# EAGLE board Thing_Plus_MGM240P-Panel (EAGLE 9.6.2), part 1 of 2
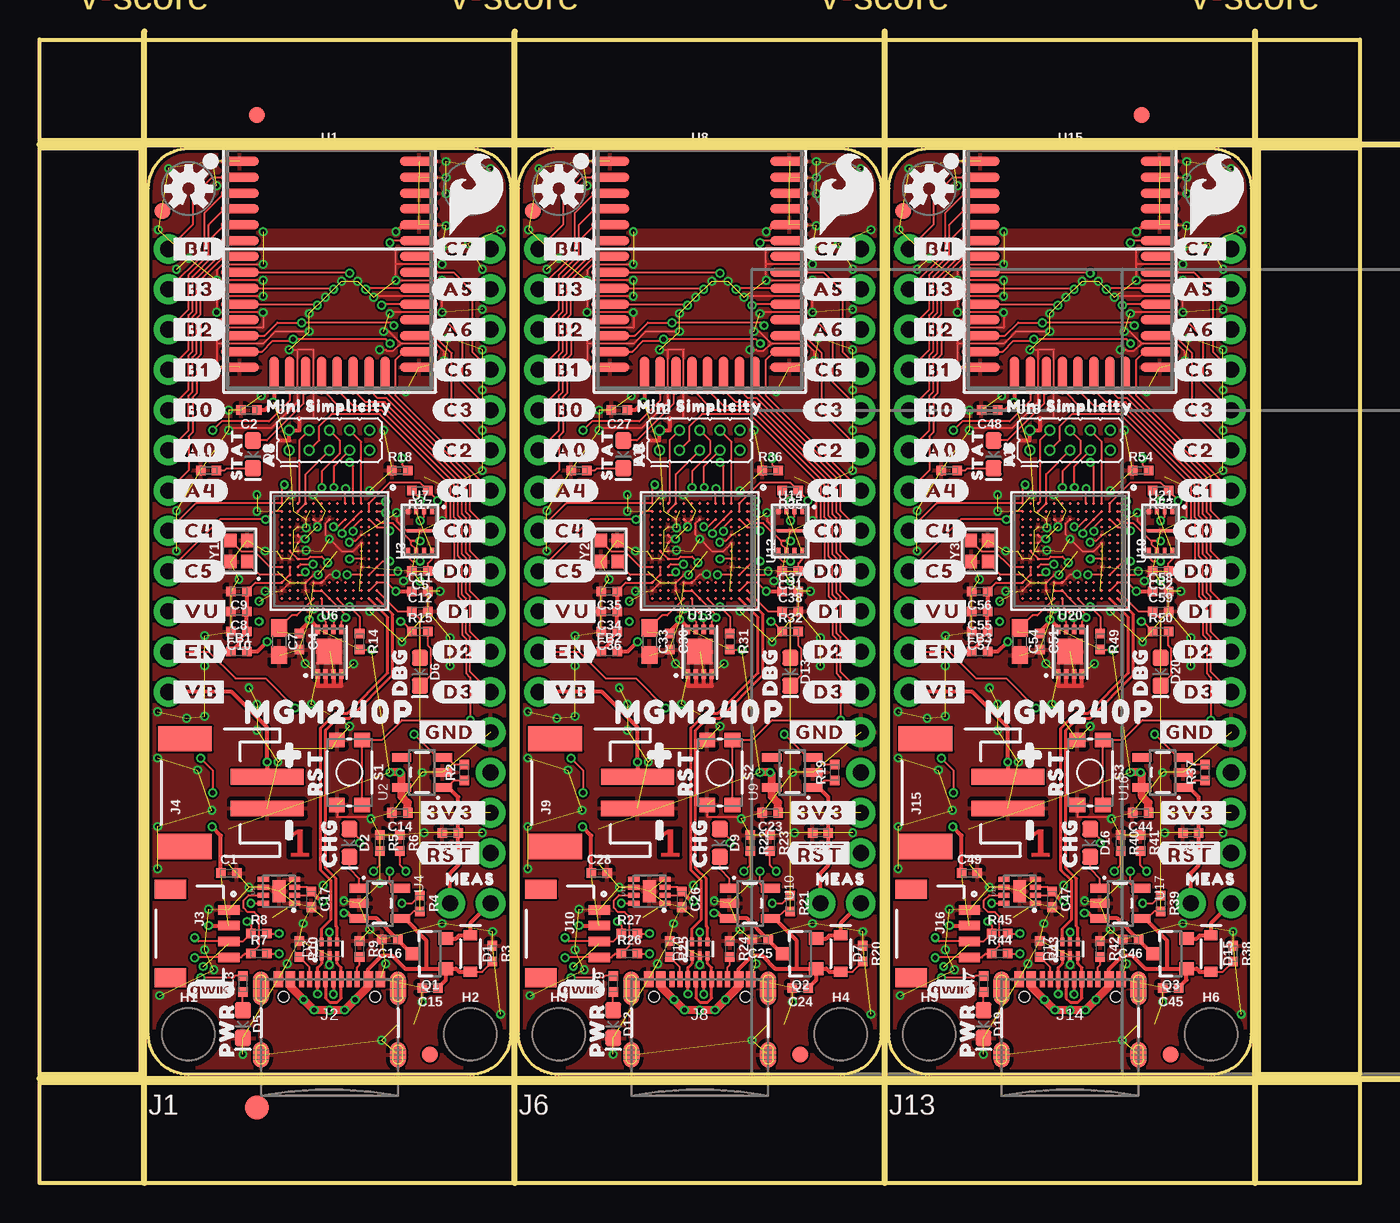
[diagram p0: board, top side]
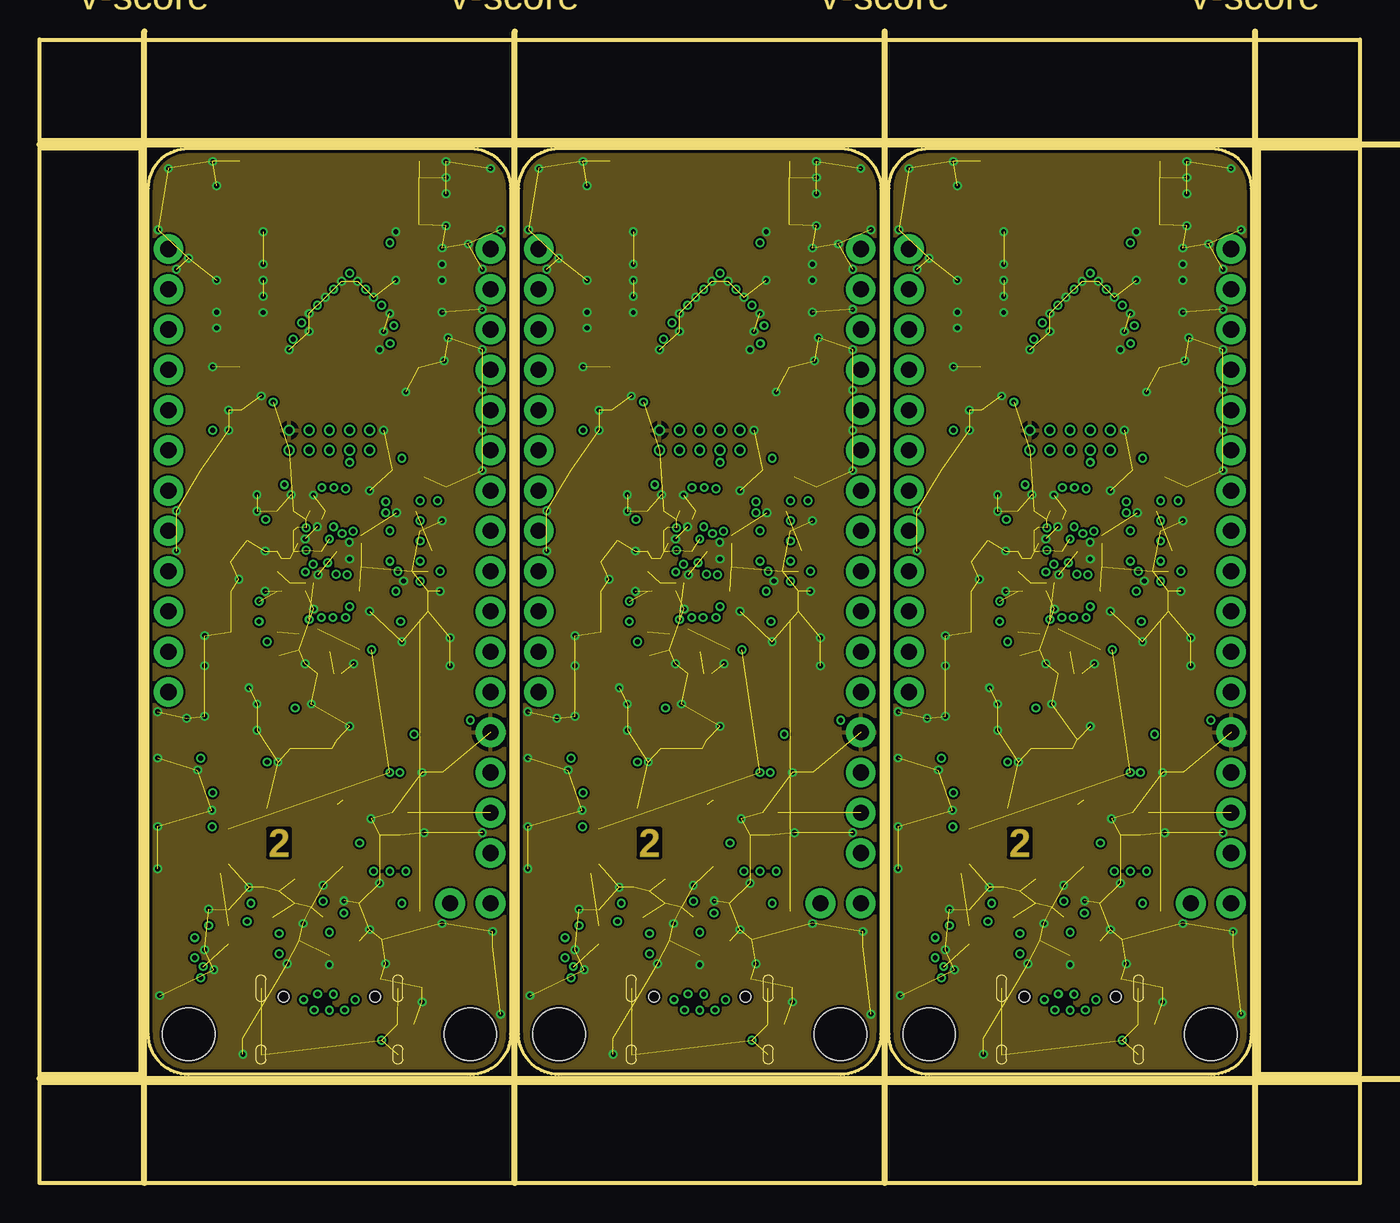
[diagram p1: board, inner layer Route2]
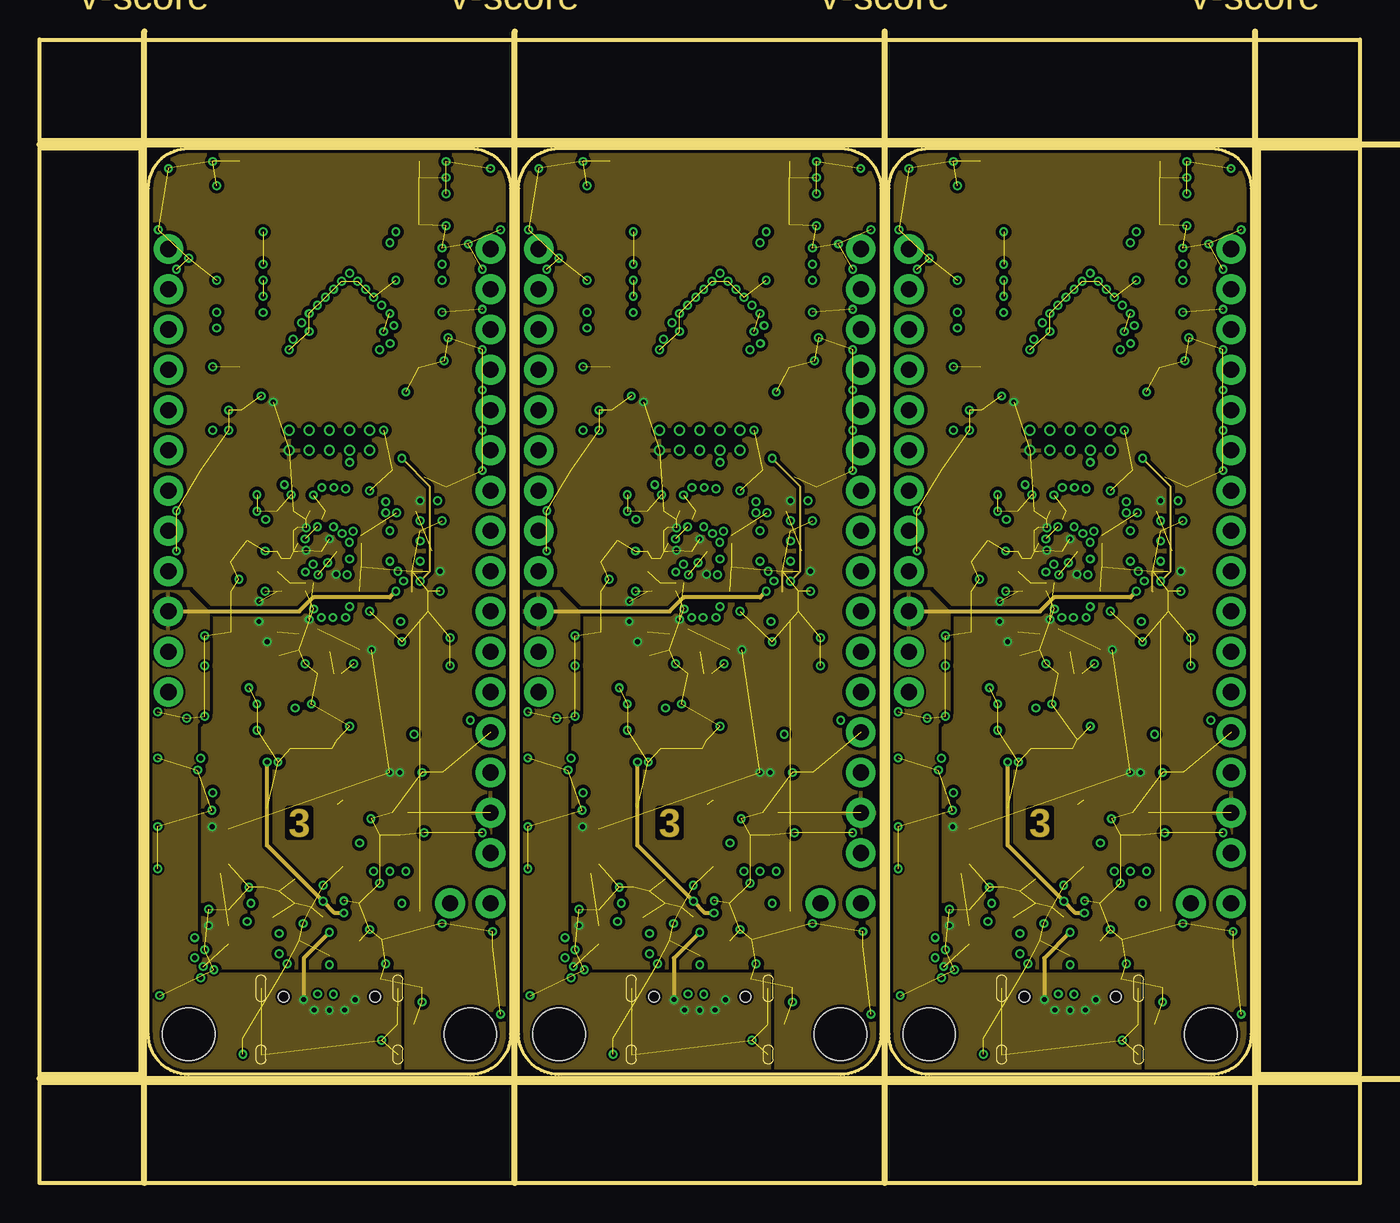
[diagram p2: board, inner layer Route15]
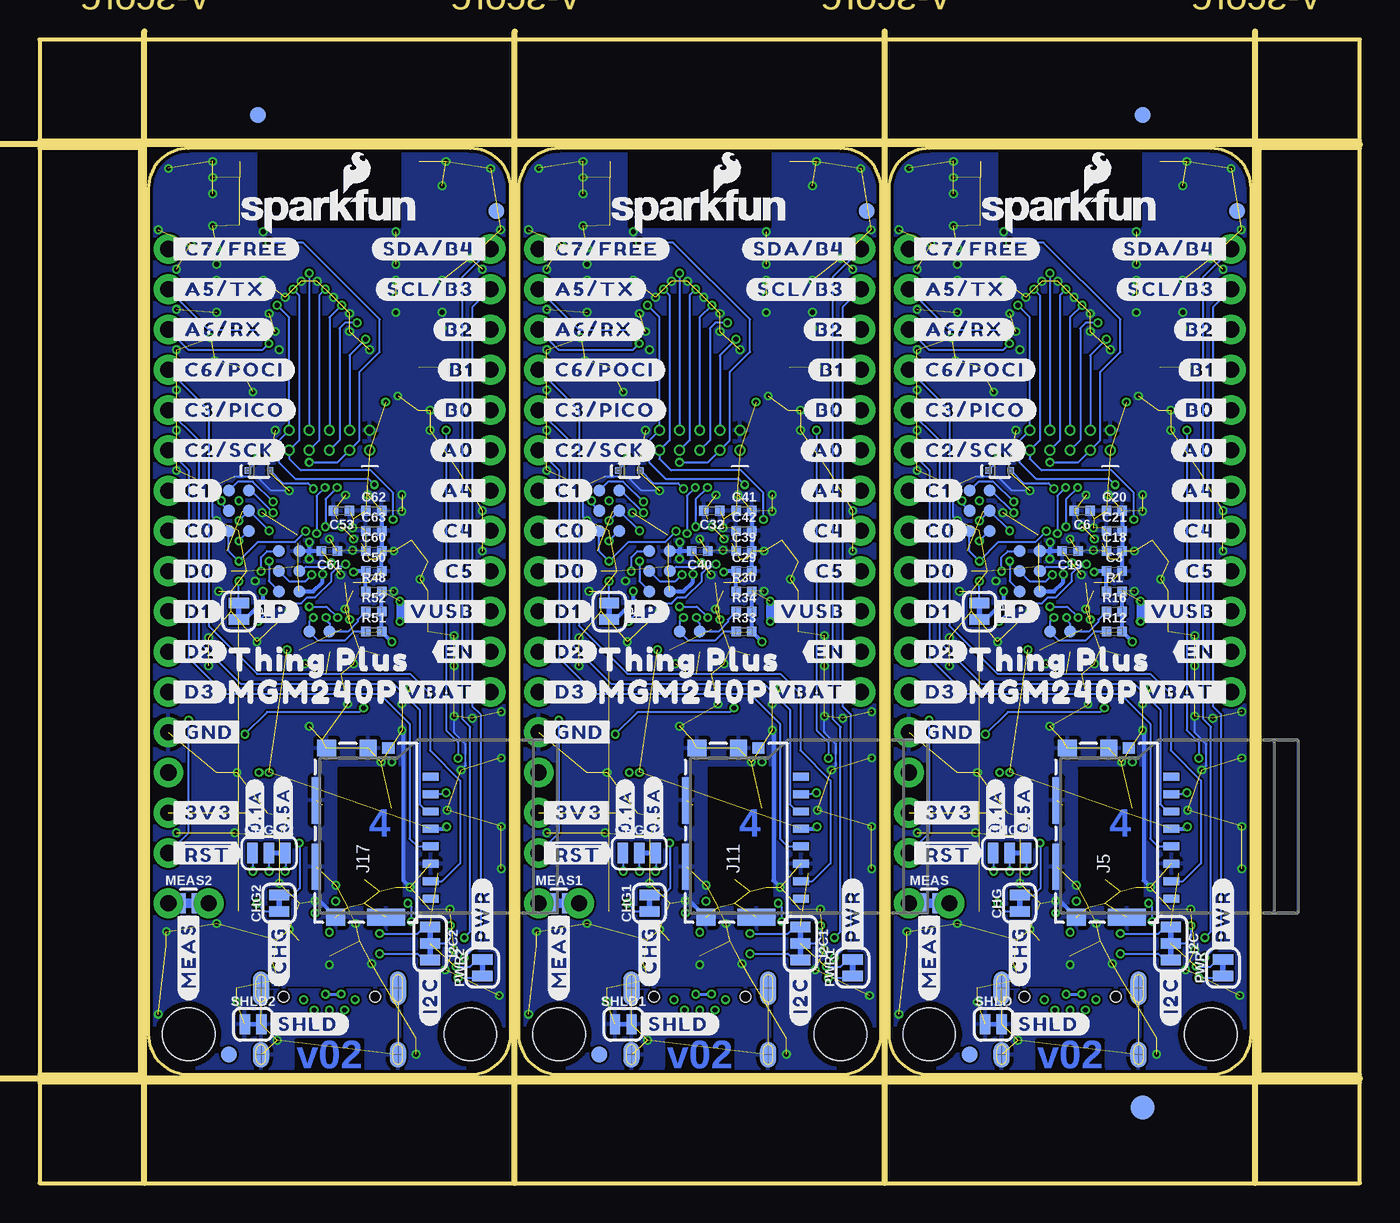
[diagram p3: board, bottom side, seen from below]

Size 83.31 x 72.14 mm. Coordinates in mm from the lower left corner, seen from the top.
Outline: 6.86,62.74 arc-90 9.4,65.28 27.18,65.28 arc-90 29.72,62.74 29.72,9.4 arc-90 27.18,6.86 9.4,6.86 arc-90 6.86,9.4 6.86,62.74
Outline: 30.23,62.74 arc-90 32.77,65.28 50.55,65.28 arc-90 53.09,62.74 53.09,9.4 arc-90 50.55,6.86 32.77,6.86 arc-90 30.23,9.4 30.23,62.74
Outline: 53.59,62.74 arc-90 56.13,65.28 73.91,65.28 arc-90 76.45,62.74 76.45,9.4 arc-90 73.91,6.86 56.13,6.86 arc-90 53.59,9.4 53.59,62.74
Outline: 0,6.35 83.31,6.35 83.31,0 0,0 0,6.35
Outline: 76.96,65.28 83.31,65.28 83.31,6.86 76.96,6.86 76.96,65.28
Outline: 0,72.14 83.31,72.14 83.31,65.79 0,65.79 0,72.14
Outline: 0,65.28 6.35,65.28 6.35,6.86 0,6.86 0,65.28
Copper layers (1*2*15*16): Top 0.035559375mm / dielectric 0.47751875mm / Route2 0.035559375mm / dielectric 0.47751875mm / Route15 0.035559375mm / dielectric 0.47751875mm / Bottom 0.035559375mm
Design rules "Thing_Plus_MGM240P": minimum track width 5mil, minimum drill 0.2mm, track to track 5mil, track to pad 5mil, pad to pad 5mil, via to via 5mil, smd to smd 5mil, copper to edge 7mil, drill to drill 7mil, minimum pad ring 5mil, minimum via ring 5mil, stop-mask expansion 2.5mil, vias tented up to drill 25mil, thermal gap 10mil
Net classes: 1 USB: width 0.185 mm, clearance 0.127 mm
tRestrict: area 23.7,63.9 to 24.1,64; area 23.7,62.9 to 24.1,63; area 47.1,63.9 to 47.5,64; area 47.1,62.9 to 47.5,63; area 70.5,63.9 to 70.9,64; area 70.5,62.9 to 70.9,63
bRestrict: area 16.6,51.1 to 16.8,51.2; area 17.3,52.1 to 17.4,52.2; area 17.9,53.7 to 18,53.8; area 18.5,54.5 to 18.7,54.6; area 19.2,55.9 to 19.3,56; area 19.8,55.9 to 19.9,56; area 20.4,54.5 to 20.6,54.6; area 40,51.1 to 40.1,51.2; area 40.6,52.1 to 40.8,52.2; area 41.3,53.7 to 41.4,53.8; area 41.9,54.5 to 42,54.6; area 42.5,55.9 to 42.7,56; area 43.2,55.9 to 43.3,56; area 43.8,54.5 to 43.9,54.6; area 63.4,51.1 to 63.5,51.2; area 64,52.1 to 64.1,52.2; area 64.6,53.7 to 64.8,53.8; area 65.3,54.5 to 65.4,54.6; area 65.9,55.9 to 66,56; area 66.5,55.9 to 66.7,56; area 67.2,54.5 to 67.3,54.6
Milling: 6 lines

## Footprints (pad centres in the part's own frame; a part is rotated, then mirrored left to right if it is on the bottom)
0402-TIGHT = smd 0.6 x 0.6: 1 -0.5,0; 2 0.5,0
0603 = smd 1.1 x 1: 1 -0.85,0; 2 0.85,0
SMT-JUMPER_2_NC_TRACE_SILK = smd 0.66 x 1.27: 1 -0.521,0; 2 0.521,0
SMT-JUMPER_3_1-NC_TRACE_SILK = smd 0.66 x 1.27: 1 -1.041,0; 2 0,0; 3 1.041,0
SOD-323 = smd 0.63 x 0.83: A 1.15,0; C -1.15,0
LED-0603 = smd 1 x 1: A -0.877,0; C 0.877,0
SOT886 = smd 0.61 x 0.25: 1 -0.405,0.5 | smd 0.56 x 0.25: 2 -0.43,0; 3 -0.43,-0.5; 4 0.43,-0.5; 5 0.43,0; 6 0.43,0.5
SOD-523 = smd 0.4 x 0.4: A -0.7,0; C 0.7,0
FIDUCIAL-1X2 = smd 1 x 1: 1 0,0
FIDUCIAL-1.5X3 = smd 1.5 x 1.5: 1 0,0
STAND-OFF = hole 3.302: 0,0
SMT-JUMPER_3_2-NC_TRACE_SILK = smd 0.66 x 1.27: 1 -1.041,0; 2 0,0; 3 1.041,0
THING_PLUS = drill 1.016 pad 1.88: 1 1.27,52.07; 2 1.27,49.53; 3 1.27,46.99; 4 1.27,44.45; 5 1.27,41.91; 6 1.27,39.37; 7 1.27,36.83; 8 1.27,34.29; 9 1.27,31.75; 10 1.27,29.21; 11 1.27,26.67; 12 1.27,24.13; 13 21.59,52.07; 14 21.59,49.53; 15 21.59,46.99; 16 21.59,44.45; 17 21.59,41.91; 18 21.59,39.37; 19 21.59,36.83; 20 21.59,34.29; 21 21.59,31.75; 22 21.59,29.21; 23 21.59,26.67; 24 21.59,24.13; 25 21.59,21.59; 26 21.59,19.05; 27 21.59,16.51; 28 21.59,13.97
USB-C-16P-4LAYER-ISOLATED = smd 0.3 x 1: A5 -1.25,-0.34; A6 -0.25,-0.34; A7 0.25,-0.34; A8 1.25,-0.34; B5 1.75,-0.34; B6 0.75,-0.34; B7 -0.75,-0.34; B8 -1.75,-0.34 | smd 0.6 x 1: GND -3.225,-0.34; GND2 3.225,-0.34; VBUS1 -2.45,-0.34; VBUS2 2.45,-0.34 | smd 1 x 2.1: SHLD1 -4.32,-0.915; SHLD2 4.32,-0.915 | smd 1 x 2.1 bottom: SHLD3 -4.32,-0.915; SHLD4 4.32,-0.915 | smd 1 x 1.6: SHLD5 -4.32,-5.095; SHLD8 4.32,-5.095 | smd 1 x 1.6 bottom: SHLD6 -4.32,-5.095; SHLD7 4.32,-5.095 | hole 0.65: -2.89,-1.445; 2.89,-1.445
JST04_1MM_RA = smd 0.6 x 1.35: 1 -1.5,0; 2 -0.5,0; 3 0.5,0; 4 1.5,0 | smd 1.2 x 2: NC1 2.8,-3.675; NC2 -2.8,-3.675
JST-2-SMD = smd 1 x 4.6: 1 -1,-3.7; 2 1,-3.7 | smd 1.6 x 3.4: NC1 -3.4,1.5; NC2 3.4,1.5
MICROSD_TINY = smd 0.5 x 1: 1 3.55,-3.85; 2 2.45,-3.85; 3 1.35,-3.85; 4 0.25,-3.85; 5 -0.85,-3.85; 6 -1.95,-3.85; 7 -3.05,-3.85; 8 -4.15,-3.85 | smd 0.72 x 0.78: 9 5.35,-1.17 | smd 1.05 x 1.08: GND1 5.35,0.1 | smd 1.05 x 1.2: GND2 5.35,2.71; GND3 -5.325,2.14 | smd 1.05 x 2.39: GND4 -5.325,-1.045 | smd 2.91 x 0.55: GND5 -2.145,3.385; GND6 2.045,3.385
2X5_PTH_SILK_.05 = drill 0.432: 1 0,0; 2 0,1.27; 3 1.27,0; 4 1.27,1.27; 5 2.54,0; 6 2.54,1.27; 7 3.81,0; 8 3.81,1.27; 9 5.08,0; 10 5.08,1.27
COMBO-JUMPER_2_NC_TRACE = smd 0.635 x 1.27: 1 -0.508,0; 2 0.508,0 | drill 1.016 pad 1.88: 3 -1.27,0; 4 1.27,0
SOT23-3 = smd 0.8 x 0.9: 1 -0.95,-1; 2 0.95,-1; 3 0,1.1
TACTILE_SWITCH_SMD_4.6X2.8MM = smd 0.9 x 1: 1 -2.05,-0.8; 2 2.05,-0.8; 3 2.05,0.8; 4 -2.05,0.8
PAD.03X.03 = smd 0.762 x 0.762: 1 0,0
MGM240P = smd 2.4 x 0.6: 1 -5.65,6.8; 2 -5.65,5.8; 3 -5.65,4.8; 4 -5.65,3.8; 5 -5.65,2.8; 6 -5.65,1.8; 7 -5.65,0.8; 8 -5.65,-0.2; 9 -5.65,-1.2; 10 -5.65,-2.2; 11 -5.65,-3.2; 12 -5.65,-4.2; 13 -5.65,-5.2; 14 -5.65,-6.2; 23 5.65,-6.2; 24 5.65,-5.2; 25 5.65,-4.2; 26 5.65,-3.2; 27 5.65,-2.2; 28 5.65,-1.2; 29 5.65,-0.2; 30 5.65,0.8; 31 5.65,1.8; 32 5.65,2.8; 33 5.65,3.8; 34 5.65,4.8; 35 5.65,5.8; 36 5.65,6.8 | smd 0.6 x 2.4: 15 -3.5,-6.7; 16 -2.5,-6.7; 17 -1.5,-6.7; 18 -0.5,-6.7; 19 0.5,-6.7; 20 1.5,-6.7; 21 2.5,-6.7; 22 3.5,-6.7
SOT23-5 = smd 0.55 x 1.2: 1 -0.95,-1.3; 2 0,-1.3; 3 0.95,-1.3; 4 0.95,1.3; 5 -0.95,1.3
EFM32GG12B410F1024GL120 = smd 0.2 x 0.2: A1 -3,3; A2 -2.5,3; A3 -2,3; A4 -1.5,3; A5 -1,3; A6 -0.5,3; A7 0,3; A8 0.5,3; A9 1,3; A10 1.5,3; A11 2,3; A12 2.5,3; A13 3,3; B1 -3,2.5; B2 -2.5,2.5; B3 -2,2.5; B4 -1.5,2.5; B5 -1,2.5; B6 -0.5,2.5; B7 0,2.5; B8 0.5,2.5; B9 1,2.5; B10 1.5,2.5; B11 2,2.5; B12 2.5,2.5; B13 3,2.5; C1 -3,2; C2 -2.5,2; C3 -2,2; C4 -1.5,2; C5 -1,2; C6 -0.5,2; C7 0,2; C8 0.5,2; C9 1,2; C10 1.5,2; C11 2,2; C12 2.5,2; C13 3,2; D1 -3,1.5; D2 -2.5,1.5; D3 -2,1.5; D11 2,1.5; D12 2.5,1.5; D13 3,1.5; E1 -3,1; E2 -2.5,1; E3 -2,1; E11 2,1; E12 2.5,1; E13 3,1; F1 -3,0.5; F2 -2.5,0.5; F3 -2,0.5; F11 2,0.5; F12 2.5,0.5; F13 3,0.5; G1 -3,0; G2 -2.5,0; G3 -2,0; G11 2,0; G12 2.5,0; G13 3,0; H1 -3,-0.5; H2 -2.5,-0.5; H3 -2,-0.5; H11 2,-0.5; H12 2.5,-0.5; H13 3,-0.5; J1 -3,-1; J2 -2.5,-1; J3 -2,-1; J11 2,-1; J12 2.5,-1; J13 3,-1; K1 -3,-1.5; K2 -2.5,-1.5; K3 -2,-1.5; K11 2,-1.5; K12 2.5,-1.5; K13 3,-1.5; L1 -3,-2; L2 -2.5,-2; L3 -2,-2; L4 -1.5,-2; L5 -1,-2; L6 -0.5,-2; L7 0,-2; L8 0.5,-2; L9 1,-2; L10 1.5,-2; L11 2,-2; L12 2.5,-2; L13 3,-2; M1 -3,-2.5; M2 -2.5,-2.5; M3 -2,-2.5; M4 -1.5,-2.5; M5 -1,-2.5; M6 -0.5,-2.5; M7 0,-2.5; M8 0.5,-2.5; M9 1,-2.5; M10 1.5,-2.5; M11 2,-2.5; M12 2.5,-2.5; M13 3,-2.5; N1 -3,-3; N2 -2.5,-3; N3 -2,-3; N4 -1.5,-3; N5 -1,-3; N6 -0.5,-3; N7 0,-3; N8 0.5,-3; N9 1,-3; N10 1.5,-3; N11 2,-3; N12 2.5,-3; N13 3,-3
DFN-8 = smd 0.3 x 0.7: 1 -0.75,-0.99; 2 -0.25,-0.99; 3 0.25,-0.99; 4 0.75,-0.99; 5 0.75,0.99; 6 0.25,0.99; 7 -0.25,0.99; 8 -0.75,0.99 | smd 1.38 x 0.8: 9 0,0
M24C02-FMC6TG = smd 0.3 x 0.6: 1 -0.75,-1.4; 2 -0.25,-1.4; 3 0.25,-1.4; 4 0.75,-1.4; 5 0.75,1.4; 6 0.25,1.4; 7 -0.25,1.4; 8 -0.75,1.4 | smd 1.6 x 1.6: EPAD 0,0
MX25R8035FZUIL0 = smd 0.25 x 0.4: 1 0.75,1.25; 2 0.25,1.25; 3 -0.25,1.25; 4 -0.75,1.25; 5 -0.75,-1.25; 6 -0.25,-1.25; 7 0.25,-1.25; 8 0.75,-1.25 | smd 1.6 x 0.2: EPAD 0,0
CRYSTAL-SMD-2.0X1.6MM-ECS = smd 0.85 x 0.75: 1 -0.675,-0.525; 2 0.675,-0.525; 3 0.675,0.525; 4 -0.675,0.525

## Placement (x,y rotation side)
C1  10uF  [0402-TIGHT]  11.94,19.56 0 top
C2  0.1uF  [0402-TIGHT]  13.21,48.77 180 top
C3  0.1uF  [0402-TIGHT]  15.49,38.61 0 bottom
C4  0.1uF  [0402-TIGHT]  16.38,34.16 270 top
C5  0.1uF  [0402-TIGHT]  24,38.61 180 top
C6  10uF  [0402-TIGHT]  17.53,42.42 180 bottom
C7  1.0uF  [0603]  15.11,34.16 270 top
C8  10nF  [0402-TIGHT]  12.57,36.07 180 top
C9  10nF  [0402-TIGHT]  12.57,37.34 180 top
C10  1.0uF  [0402-TIGHT]  12.57,34.8 180 top
C11  1.0uF  [0402-TIGHT]  24,37.34 0 top
C12  4.7uF  [0402-TIGHT]  24,36.07 0 top
C13  1.0uF  [0402-TIGHT]  25.91,22.1 180 top
C14  2.2uF  [0402-TIGHT]  22.73,23.37 180 top
C15  4.7uF  [0402-TIGHT]  24.64,12.32 180 top
C16  4.7uF  [0402-TIGHT]  22.1,15.37 180 top
C17  0.1uF  [0402-TIGHT]  17.14,17.91 270 top
C18  0.1uF  [0402-TIGHT]  15.49,39.88 0 bottom
C19  0.1uF  [0402-TIGHT]  18.29,39.88 180 bottom
C20  0.1uF  [0402-TIGHT]  15.49,42.42 0 bottom
C21  0.1uF  [0402-TIGHT]  15.49,41.15 0 bottom
C22  1.0uF  [0402-TIGHT]  49.28,22.1 180 top
C23  2.2uF  [0402-TIGHT]  46.1,23.37 180 top
C24  4.7uF  [0402-TIGHT]  48.01,12.32 180 top
C25  4.7uF  [0402-TIGHT]  45.47,15.37 180 top
C26  0.1uF  [0402-TIGHT]  40.51,17.91 270 top
C27  0.1uF  [0402-TIGHT]  36.58,48.77 180 top
C28  10uF  [0402-TIGHT]  35.31,19.56 0 top
C29  0.1uF  [0402-TIGHT]  38.86,38.61 0 bottom
C30  0.1uF  [0402-TIGHT]  39.75,34.16 270 top
C31  0.1uF  [0402-TIGHT]  47.37,38.61 180 top
C32  10uF  [0402-TIGHT]  40.89,42.42 180 bottom
C33  1.0uF  [0603]  38.48,34.16 270 top
C34  10nF  [0402-TIGHT]  35.94,36.07 180 top
C35  10nF  [0402-TIGHT]  35.94,37.34 180 top
C36  1.0uF  [0402-TIGHT]  35.94,34.8 180 top
C37  1.0uF  [0402-TIGHT]  47.37,37.34 0 top
C38  4.7uF  [0402-TIGHT]  47.37,36.07 0 top
C39  0.1uF  [0402-TIGHT]  38.86,39.88 0 bottom
C40  0.1uF  [0402-TIGHT]  41.66,39.88 180 bottom
C41  0.1uF  [0402-TIGHT]  38.86,42.42 0 bottom
C42  0.1uF  [0402-TIGHT]  38.86,41.15 0 bottom
C43  1.0uF  [0402-TIGHT]  72.64,22.1 180 top
C44  2.2uF  [0402-TIGHT]  69.47,23.37 180 top
C45  4.7uF  [0402-TIGHT]  71.37,12.32 180 top
C46  4.7uF  [0402-TIGHT]  68.83,15.37 180 top
C47  0.1uF  [0402-TIGHT]  63.88,17.91 270 top
C48  0.1uF  [0402-TIGHT]  59.94,48.77 180 top
C49  10uF  [0402-TIGHT]  58.67,19.56 0 top
C50  0.1uF  [0402-TIGHT]  62.23,38.61 0 bottom
C51  0.1uF  [0402-TIGHT]  63.12,34.16 270 top
C52  0.1uF  [0402-TIGHT]  70.74,38.61 180 top
C53  10uF  [0402-TIGHT]  64.26,42.42 180 bottom
C54  1.0uF  [0603]  61.85,34.16 270 top
C55  10nF  [0402-TIGHT]  59.31,36.07 180 top
C56  10nF  [0402-TIGHT]  59.31,37.34 180 top
C57  1.0uF  [0402-TIGHT]  59.31,34.8 180 top
C58  1.0uF  [0402-TIGHT]  70.74,37.34 0 top
C59  4.7uF  [0402-TIGHT]  70.74,36.07 0 top
C60  0.1uF  [0402-TIGHT]  62.23,39.88 0 bottom
C61  0.1uF  [0402-TIGHT]  65.02,39.88 180 bottom
C62  0.1uF  [0402-TIGHT]  62.23,42.42 0 bottom
C63  0.1uF  [0402-TIGHT]  62.23,41.15 0 bottom
CHG  JUMPER-SMT_2_NC_TRACE_SILK  [SMT-JUMPER_2_NC_TRACE_SILK]  21.46,17.65 90 bottom
CHG1  JUMPER-SMT_2_NC_TRACE_SILK  [SMT-JUMPER_2_NC_TRACE_SILK]  44.83,17.65 90 bottom
CHG2  JUMPER-SMT_2_NC_TRACE_SILK  [SMT-JUMPER_2_NC_TRACE_SILK]  68.2,17.65 90 bottom
CHG_I  JUMPER-SMT_3_1-NC_TRACE_SILK  [SMT-JUMPER_3_1-NC_TRACE_SILK]  22.1,20.83 0 bottom
CHG_I1  JUMPER-SMT_3_1-NC_TRACE_SILK  [SMT-JUMPER_3_1-NC_TRACE_SILK]  45.47,20.83 0 bottom
CHG_I2  JUMPER-SMT_3_1-NC_TRACE_SILK  [SMT-JUMPER_3_1-NC_TRACE_SILK]  68.83,20.83 0 bottom
D1  1A/23V/620mV  [SOD-323]  27.18,14.48 270 top
D2  Yellow  [LED-0603]  19.56,21.46 270 top
D3  PRTR5V0U2F  [SOT886]  18.29,14.78 90 top
D4  BLUE  [LED-0603]  13.46,45.97 270 top
D5  RED  [LED-0603]  12.83,10.03 270 top
D6  BLUE  [LED-0603]  24,32.26 270 top
D7  1A/23V/620mV  [SOD-323]  50.55,14.48 270 top
D8  120mA/40V/370mV  [SOD-523]  22.73,44.96 180 bottom
D9  Yellow  [LED-0603]  42.93,21.46 270 top
D10  PRTR5V0U2F  [SOT886]  41.66,14.78 90 top
D11  BLUE  [LED-0603]  36.83,45.97 270 top
D12  RED  [LED-0603]  36.2,10.03 270 top
D13  BLUE  [LED-0603]  47.37,32.26 270 top
D14  120mA/40V/370mV  [SOD-523]  46.1,44.96 180 bottom
D15  1A/23V/620mV  [SOD-323]  73.91,14.48 270 top
D16  Yellow  [LED-0603]  66.29,21.46 270 top
D17  PRTR5V0U2F  [SOT886]  65.02,14.78 90 top
D18  BLUE  [LED-0603]  60.2,45.97 270 top
D19  RED  [LED-0603]  59.56,10.03 270 top
D20  BLUE  [LED-0603]  70.74,32.26 270 top
D21  120mA/40V/370mV  [SOD-523]  69.47,44.96 180 bottom
E$1  [FIDUCIAL-1X2]  13.72,67.37 0 top
E$2  [FIDUCIAL-1X2]  13.72,67.37 0 bottom
E$3  [FIDUCIAL-1X2]  69.53,67.37 0 top
E$4  [FIDUCIAL-1X2]  69.53,67.37 0 bottom
E$5  [FIDUCIAL-1.5X3]  13.72,4.76 0 top
E$6  [FIDUCIAL-1.5X3]  13.72,4.76 0 bottom
FB1  FERRITE_BEAD-120_OHM-0402T  [0402-TIGHT]  12.57,33.53 0 top
FB2  FERRITE_BEAD-120_OHM-0402T  [0402-TIGHT]  35.94,33.53 0 top
FB3  FERRITE_BEAD-120_OHM-0402T  [0402-TIGHT]  59.31,33.53 0 top
FD1  FIDUCIAL1X2  [FIDUCIAL-1X2]  7.75,61.34 0 bottom
FD2  FIDUCIAL1X2  [FIDUCIAL-1X2]  7.75,61.34 0 top
FD3  FIDUCIAL1X2  [FIDUCIAL-1X2]  24.64,8.13 0 top
FD4  FIDUCIAL1X2  [FIDUCIAL-1X2]  24.64,8.13 0 bottom
FD5  FIDUCIAL1X2  [FIDUCIAL-1X2]  31.12,61.34 0 bottom
FD6  FIDUCIAL1X2  [FIDUCIAL-1X2]  31.12,61.34 0 top
FD7  FIDUCIAL1X2  [FIDUCIAL-1X2]  48.01,8.13 0 top
FD8  FIDUCIAL1X2  [FIDUCIAL-1X2]  48.01,8.13 0 bottom
FD9  FIDUCIAL1X2  [FIDUCIAL-1X2]  54.48,61.34 0 bottom
FD10  FIDUCIAL1X2  [FIDUCIAL-1X2]  54.48,61.34 0 top
FD11  FIDUCIAL1X2  [FIDUCIAL-1X2]  71.37,8.13 0 top
FD12  FIDUCIAL1X2  [FIDUCIAL-1X2]  71.37,8.13 0 bottom
H1  STAND-OFF  [STAND-OFF]  9.4,9.4 0 top
H2  STAND-OFF  [STAND-OFF]  27.18,9.4 0 top
H3  STAND-OFF  [STAND-OFF]  32.77,9.4 0 top
H4  STAND-OFF  [STAND-OFF]  50.55,9.4 0 top
H5  STAND-OFF  [STAND-OFF]  56.13,9.4 0 top
H6  STAND-OFF  [STAND-OFF]  73.91,9.4 0 top
I2C  JUMPER-SMT_3_2-NC_TRACE_SILK  [SMT-JUMPER_3_2-NC_TRACE_SILK]  11.94,15.11 270 bottom
I2C1  JUMPER-SMT_3_2-NC_TRACE_SILK  [SMT-JUMPER_3_2-NC_TRACE_SILK]  35.31,15.11 270 bottom
I2C2  JUMPER-SMT_3_2-NC_TRACE_SILK  [SMT-JUMPER_3_2-NC_TRACE_SILK]  58.67,15.11 270 bottom
J1  THING_PLUS_LOGICAL  [THING_PLUS]  6.86,6.86 0 top
J2  USB Female Type C Connector  [USB-C-16P-4LAYER-ISOLATED]  18.29,13.21 0 top
J3  QWIIC_RIGHT_ANGLE  [JST04_1MM_RA]  11.94,15.75 270 top
J4  [JST-2-SMD]  10.67,24.64 90 top
J5  MICRO-SDFRICTION  [MICROSD_TINY]  15.75,22.1 90 bottom
J6  THING_PLUS_LOGICAL  [THING_PLUS]  30.23,6.86 0 top
J7  [2X5_PTH_SILK_.05]  15.75,46.23 0 top
J8  USB Female Type C Connector  [USB-C-16P-4LAYER-ISOLATED]  41.66,13.21 0 top
J9  [JST-2-SMD]  34.04,24.64 90 top
J10  QWIIC_RIGHT_ANGLE  [JST04_1MM_RA]  35.31,15.75 270 top
J11  MICRO-SDFRICTION  [MICROSD_TINY]  39.12,22.1 90 bottom
J12  [2X5_PTH_SILK_.05]  39.12,46.23 0 top
J13  THING_PLUS_LOGICAL  [THING_PLUS]  53.59,6.86 0 top
J14  USB Female Type C Connector  [USB-C-16P-4LAYER-ISOLATED]  65.02,13.21 0 top
J15  [JST-2-SMD]  57.4,24.64 90 top
J16  QWIIC_RIGHT_ANGLE  [JST04_1MM_RA]  58.67,15.75 270 top
J17  MICRO-SDFRICTION  [MICROSD_TINY]  62.48,22.1 90 bottom
J18  [2X5_PTH_SILK_.05]  62.48,46.23 0 top
LOGO1  SFE_LOGO_NAME_FLAME.1_INCH  [SFE_LOGO_NAME_FLAME_.1]  18.29,61.34 0 bottom
LOGO2  QWIIC_LOGO_3MM  [QWIIC_3MM]  10.79,12.19 0 top
LOGO3  OSHW-LOGOS  [OSHW-LOGO-S]  9.4,62.74 0 top
LOGO4  SFE_LOGO_NAME_FLAME.1_INCH  [SFE_LOGO_NAME_FLAME_.1]  41.66,61.34 0 bottom
LOGO5  QWIIC_LOGO_3MM  [QWIIC_3MM]  34.16,12.19 0 top
LOGO6  OSHW-LOGOS  [OSHW-LOGO-S]  32.77,62.74 0 top
LOGO7  SFE_LOGO_NAME_FLAME.1_INCH  [SFE_LOGO_NAME_FLAME_.1]  65.02,61.34 0 bottom
LOGO8  QWIIC_LOGO_3MM  [QWIIC_3MM]  57.53,12.19 0 top
LOGO9  OSHW-LOGOS  [OSHW-LOGO-S]  56.13,62.74 0 top
LP  JUMPER-SMT_2_NC_TRACE_SILK  [SMT-JUMPER_2_NC_TRACE_SILK]  24,36.07 270 bottom
LP1  JUMPER-SMT_2_NC_TRACE_SILK  [SMT-JUMPER_2_NC_TRACE_SILK]  47.37,36.07 270 bottom
LP2  JUMPER-SMT_2_NC_TRACE_SILK  [SMT-JUMPER_2_NC_TRACE_SILK]  70.74,36.07 270 bottom
MEAS  JUMPER-COMBO_2_NC_TRACE  [COMBO-JUMPER_2_NC_TRACE]  27.18,17.65 0 bottom
MEAS1  JUMPER-COMBO_2_NC_TRACE  [COMBO-JUMPER_2_NC_TRACE]  50.55,17.65 0 bottom
MEAS2  JUMPER-COMBO_2_NC_TRACE  [COMBO-JUMPER_2_NC_TRACE]  73.91,17.65 0 bottom
PWR  JUMPER-SMT_2_NC_TRACE_SILK  [SMT-JUMPER_2_NC_TRACE_SILK]  8.64,13.59 90 bottom
PWR1  JUMPER-SMT_2_NC_TRACE_SILK  [SMT-JUMPER_2_NC_TRACE_SILK]  32,13.59 90 bottom
PWR2  JUMPER-SMT_2_NC_TRACE_SILK  [SMT-JUMPER_2_NC_TRACE_SILK]  55.37,13.59 90 bottom
Q1  20V/4.2A/52mΩ/1.4W  [SOT23-3]  24.64,14.48 90 top
Q2  20V/4.2A/52mΩ/1.4W  [SOT23-3]  48.01,14.48 90 top
Q3  20V/4.2A/52mΩ/1.4W  [SOT23-3]  71.37,14.48 90 top
R1  1k  [0402-TIGHT]  15.49,37.34 0 bottom
R2  10k  [0402-TIGHT]  26.8,25.91 90 top
R3  10k  [0402-TIGHT]  28.57,14.48 270 top
R4  4.7k  [0402-TIGHT]  24,17.65 270 top
R5  2.0K  [0402-TIGHT]  21.46,21.46 270 top
R6  10k  [0402-TIGHT]  22.73,21.46 270 top
R7  2.2k  [0402-TIGHT]  13.84,14.48 0 top
R8  2.2k  [0402-TIGHT]  13.84,15.75 0 top
R9  5.1k  [0402-TIGHT]  20.19,14.78 270 top
R10  5.1k  [0402-TIGHT]  16.38,14.78 270 top
R11  2.2k  [0402-TIGHT]  10.67,44.96 0 top
R12  2.2k  [0402-TIGHT]  15.49,34.8 0 bottom
R13  1k  [0402-TIGHT]  12.83,12.57 90 top
R14  100k  [0402-TIGHT]  20.19,34.16 270 top
R15  2.2k  [0402-TIGHT]  24,34.8 0 top
R16  2.2k  [0402-TIGHT]  15.49,36.07 0 bottom
R17  10k  [0402-TIGHT]  24,43.69 180 top
R18  1k  [0402-TIGHT]  22.73,44.96 0 top
R19  10k  [0402-TIGHT]  50.16,25.91 90 top
R20  10k  [0402-TIGHT]  51.94,14.48 270 top
R21  4.7k  [0402-TIGHT]  47.37,17.65 270 top
R22  2.0K  [0402-TIGHT]  44.83,21.46 270 top
R23  10k  [0402-TIGHT]  46.1,21.46 270 top
R24  5.1k  [0402-TIGHT]  43.56,14.78 270 top
R25  5.1k  [0402-TIGHT]  39.75,14.78 270 top
R26  2.2k  [0402-TIGHT]  37.21,14.48 0 top
R27  2.2k  [0402-TIGHT]  37.21,15.75 0 top
R28  2.2k  [0402-TIGHT]  34.04,44.96 0 top
R29  1k  [0402-TIGHT]  36.2,12.57 90 top
R30  1k  [0402-TIGHT]  38.86,37.34 0 bottom
R31  100k  [0402-TIGHT]  43.56,34.16 270 top
R32  2.2k  [0402-TIGHT]  47.37,34.8 0 top
R33  2.2k  [0402-TIGHT]  38.86,34.8 0 bottom
R34  2.2k  [0402-TIGHT]  38.86,36.07 0 bottom
R35  10k  [0402-TIGHT]  47.37,43.69 180 top
R36  1k  [0402-TIGHT]  46.1,44.96 0 top
R37  10k  [0402-TIGHT]  73.53,25.91 90 top
R38  10k  [0402-TIGHT]  75.31,14.48 270 top
R39  4.7k  [0402-TIGHT]  70.74,17.65 270 top
R40  2.0K  [0402-TIGHT]  68.2,21.46 270 top
R41  10k  [0402-TIGHT]  69.47,21.46 270 top
R42  5.1k  [0402-TIGHT]  66.93,14.78 270 top
R43  5.1k  [0402-TIGHT]  63.12,14.78 270 top
R44  2.2k  [0402-TIGHT]  60.58,14.48 0 top
R45  2.2k  [0402-TIGHT]  60.58,15.75 0 top
R46  2.2k  [0402-TIGHT]  57.4,44.96 0 top
R47  1k  [0402-TIGHT]  59.56,12.57 90 top
R48  1k  [0402-TIGHT]  62.23,37.34 0 bottom
R49  100k  [0402-TIGHT]  66.93,34.16 270 top
R50  2.2k  [0402-TIGHT]  70.74,34.8 0 top
R51  2.2k  [0402-TIGHT]  62.23,34.8 0 bottom
R52  2.2k  [0402-TIGHT]  62.23,36.07 0 bottom
R53  10k  [0402-TIGHT]  70.74,43.69 180 top
R54  1k  [0402-TIGHT]  69.47,44.96 0 top
S1  MOMENTARY-SWITCH-SPST-SMD-4.6X2.8MM  [TACTILE_SWITCH_SMD_4.6X2.8MM]  19.56,25.91 270 top
S2  MOMENTARY-SWITCH-SPST-SMD-4.6X2.8MM  [TACTILE_SWITCH_SMD_4.6X2.8MM]  42.93,25.91 270 top
S3  MOMENTARY-SWITCH-SPST-SMD-4.6X2.8MM  [TACTILE_SWITCH_SMD_4.6X2.8MM]  66.29,25.91 270 top
SHLD  JUMPER-SMT_2_NC_TRACE_SILK  [SMT-JUMPER_2_NC_TRACE_SILK]  23.11,10.03 0 bottom
SHLD1  JUMPER-SMT_2_NC_TRACE_SILK  [SMT-JUMPER_2_NC_TRACE_SILK]  46.48,10.03 0 bottom
SHLD2  JUMPER-SMT_2_NC_TRACE_SILK  [SMT-JUMPER_2_NC_TRACE_SILK]  69.85,10.03 0 bottom
TP1  TEST-POINT3  [PAD.03X.03]  20.19,37.34 0 bottom
TP2  TEST-POINT3  [PAD.03X.03]  21.46,37.34 0 bottom
TP3  TEST-POINT3  [PAD.03X.03]  20.19,38.61 0 bottom
TP4  TEST-POINT3  [PAD.03X.03]  21.46,38.61 0 bottom
TP5  TEST-POINT3  [PAD.03X.03]  20.19,39.88 0 bottom
TP6  TEST-POINT3  [PAD.03X.03]  21.46,39.88 0 bottom
TP7  TEST-POINT3  [PAD.03X.03]  24.64,41.15 0 bottom
TP8  TEST-POINT3  [PAD.03X.03]  23.37,42.42 0 bottom
TP9  TEST-POINT3  [PAD.03X.03]  23.37,41.15 0 bottom
TP10  TEST-POINT3  [PAD.03X.03]  24.64,42.42 0 bottom
TP11  TEST-POINT3  [PAD.03X.03]  19.56,34.8 0 bottom
TP12  TEST-POINT3  [PAD.03X.03]  18.29,34.8 0 bottom
TP13  TEST-POINT3  [PAD.03X.03]  24.64,43.69 0 bottom
TP14  TEST-POINT3  [PAD.03X.03]  23.37,43.69 0 bottom
TP15  TEST-POINT3  [PAD.03X.03]  43.56,37.34 0 bottom
TP16  TEST-POINT3  [PAD.03X.03]  44.83,37.34 0 bottom
TP17  TEST-POINT3  [PAD.03X.03]  43.56,38.61 0 bottom
TP18  TEST-POINT3  [PAD.03X.03]  44.83,38.61 0 bottom
TP19  TEST-POINT3  [PAD.03X.03]  43.56,39.88 0 bottom
TP20  TEST-POINT3  [PAD.03X.03]  44.83,39.88 0 bottom
TP21  TEST-POINT3  [PAD.03X.03]  48.01,41.15 0 bottom
TP22  TEST-POINT3  [PAD.03X.03]  46.74,42.42 0 bottom
TP23  TEST-POINT3  [PAD.03X.03]  46.74,41.15 0 bottom
TP24  TEST-POINT3  [PAD.03X.03]  48.01,42.42 0 bottom
TP25  TEST-POINT3  [PAD.03X.03]  42.93,34.8 0 bottom
TP26  TEST-POINT3  [PAD.03X.03]  41.66,34.8 0 bottom
TP27  TEST-POINT3  [PAD.03X.03]  48.01,43.69 0 bottom
TP28  TEST-POINT3  [PAD.03X.03]  46.74,43.69 0 bottom
TP29  TEST-POINT3  [PAD.03X.03]  66.93,37.34 0 bottom
TP30  TEST-POINT3  [PAD.03X.03]  68.2,37.34 0 bottom
TP31  TEST-POINT3  [PAD.03X.03]  66.93,38.61 0 bottom
TP32  TEST-POINT3  [PAD.03X.03]  68.2,38.61 0 bottom
TP33  TEST-POINT3  [PAD.03X.03]  66.93,39.88 0 bottom
TP34  TEST-POINT3  [PAD.03X.03]  68.2,39.88 0 bottom
TP35  TEST-POINT3  [PAD.03X.03]  71.37,41.15 0 bottom
TP36  TEST-POINT3  [PAD.03X.03]  70.1,42.42 0 bottom
TP37  TEST-POINT3  [PAD.03X.03]  70.1,41.15 0 bottom
TP38  TEST-POINT3  [PAD.03X.03]  71.37,42.42 0 bottom
TP39  TEST-POINT3  [PAD.03X.03]  66.29,34.8 0 bottom
TP40  TEST-POINT3  [PAD.03X.03]  65.02,34.8 0 bottom
TP41  TEST-POINT3  [PAD.03X.03]  71.37,43.69 0 bottom
TP42  TEST-POINT3  [PAD.03X.03]  70.1,43.69 0 bottom
U1  MGM240P  [MGM240P]  18.29,57.66 0 top
U2  XC6222B331MR-G  [SOT23-5]  24.13,25.91 90 top
U3  EFM32GG12B410F1024GL120  [EFM32GG12B410F1024GL120]  18.29,39.88 270 top
U4  MCP73831  [SOT23-5]  21.46,17.65 270 top
U5  MAX17048  [DFN-8]  15.11,18.41 90 top
U6  M24C02-FMC6TG  [M24C02-FMC6TG]  18.29,33.53 0 top
U7  MX25R8035FZUIL0  [MX25R8035FZUIL0]  24,41.15 0 top
U8  MGM240P  [MGM240P]  41.66,57.66 0 top
U9  XC6222B331MR-G  [SOT23-5]  47.5,25.91 90 top
U10  MCP73831  [SOT23-5]  44.83,17.65 270 top
U11  MAX17048  [DFN-8]  38.48,18.41 90 top
U12  EFM32GG12B410F1024GL120  [EFM32GG12B410F1024GL120]  41.66,39.88 270 top
U13  M24C02-FMC6TG  [M24C02-FMC6TG]  41.66,33.53 0 top
U14  MX25R8035FZUIL0  [MX25R8035FZUIL0]  47.37,41.15 0 top
U15  MGM240P  [MGM240P]  65.02,57.66 0 top
U16  XC6222B331MR-G  [SOT23-5]  70.87,25.91 90 top
U17  MCP73831  [SOT23-5]  68.2,17.65 270 top
U18  MAX17048  [DFN-8]  61.85,18.41 90 top
U19  EFM32GG12B410F1024GL120  [EFM32GG12B410F1024GL120]  65.02,39.88 270 top
U20  M24C02-FMC6TG  [M24C02-FMC6TG]  65.02,33.53 0 top
U21  MX25R8035FZUIL0  [MX25R8035FZUIL0]  70.74,41.15 0 top
U$1  [#_B4#0]  8.13,58.93 0 top
U$2  [#_B3#0]  8.13,56.39 0 top
U$3  [#_B2#0]  8.13,53.85 0 top
U$4  [#_B1#0]  8.13,51.31 0 top
U$5  [#SHLD#0]  22.23,10.03 0 bottom
U$6  [#_B0#0]  8.13,48.77 0 top
U$7  [#_A0#0]  8.13,46.23 0 top
U$8  [#_A4#0]  8.13,43.69 0 top
U$9  [#_C5#0]  8.13,38.61 0 top
U$10  [#_C4#0]  8.13,41.15 0 top
U$11  [#C7_#0]  28.45,58.93 0 top
U$12  [#A5_#0]  28.45,56.39 0 top
U$13  [#A6_#0]  28.45,53.85 0 top
U$14  [#C6_#0]  28.45,51.31 0 top
U$15  [#C3_#0]  28.45,48.77 0 top
U$16  [#C2_#0]  28.45,46.23 0 top
U$17  [#C1_#0]  28.45,43.69 0 top
U$18  [#C0_#0]  28.45,41.15 0 top
U$19  [#PWR#0]  8.64,14.48 90 bottom
U$20  [PWR0]  11.81,9.65 90 top
U$21  [#GND_#0]  28.45,28.45 0 top
U$22  [#3V3_#0]  28.45,23.37 0 top
U$23  [MGM240P0]  18.29,29.72 0 top
U$24  [#D0_#0]  28.45,38.61 0 top
U$25  [#_VB#0]  8.13,30.99 0 top
U$26  [#_VU#0]  8.13,36.07 0 top
U$27  [#_EN#0]  8.13,33.53 0 top
U$28  [##RST##0]  28.07,20.83 0 top
U$29  [SFE_LOGO_FLAME_.2]  27.56,62.36 0 top
U$30  [#0]  15.75,27.18 90 top
U$31  [#1]  15.75,22.1 270 top
U$32  [#D1_#0]  28.45,36.07 0 top
U$33  [#LP#0]  23.37,36.07 0 bottom
U$34  [#_A6#RX#0]  28.45,53.85 0 bottom
U$35  [#_C6#POCI#0]  28.45,51.31 0 bottom
U$36  [#_C3#PICO#0]  28.45,48.77 0 bottom
U$37  [#_C2#SCK#0]  28.45,46.23 0 bottom
U$38  [MINI_SIMPLICITY0]  18.29,49.02 0 top
U$39  [#_C1#0]  28.45,43.69 0 bottom
U$40  [#_C0#0]  28.45,41.15 0 bottom
U$41  [#_D0#0]  28.45,38.61 0 bottom
U$42  [#_D1#0]  28.45,36.07 0 bottom
U$43  [#_GND#0]  28.45,28.45 0 bottom
U$44  [#_3V3#0]  28.45,23.37 0 bottom
U$45  [#_#RST##0]  28.45,20.83 0 bottom
U$46  [#_D2#0]  28.45,33.53 0 bottom
U$47  [#_D3#0]  28.45,30.99 0 bottom
U$48  [#C4_#0]  8.13,41.15 0 bottom
U$49  [#C5_#0]  8.13,38.61 0 bottom
U$50  [#A4_#0]  8.13,43.69 0 bottom
U$51  [#A0_#0]  8.13,46.23 0 bottom
U$52  [#B0_#0]  8.13,48.77 0 bottom
U$53  [#B2_#0]  8.13,53.85 0 bottom
U$54  [#B1_#0]  8.13,51.31 0 bottom
U$55  [#VBAT_#0]  8.13,30.99 0 bottom
U$56  [#VUSB_#0]  8.13,36.07 0 bottom
U$57  [#EN_#0]  8.13,33.53 0 bottom
U$58  [MGM240P0]  19.3,30.99 0 bottom
U$59  [#MEAS#0]  27.18,17.14 90 bottom
U$60  [#CHG#0]  21.46,16.89 90 bottom
U$61  [#I2C#0]  11.94,13.72 90 bottom
U$62  [#D2_#0]  28.45,33.53 0 top
U$63  [#0#5A#0]  21.21,21.46 90 bottom
U$64  [#0#1A#0]  22.99,21.46 90 bottom
U$65  [#SHLD#0]  45.59,10.03 0 bottom
U$66  [MEAS81]  27.18,19.18 0 top
U$67  [CHG0]  18.29,21.46 90 top
U$68  [STAT0]  12.45,45.97 90 top
U$69  [THING_PLUS0]  18.92,33.02 0 bottom
U$70  [RST0]  17.4,25.91 90 top
U$71  [#_A5#TX#0]  28.45,56.39 0 bottom
U$72  [A80]  14.48,45.97 90 top
U$73  [#SDA#B4_#0]  8.13,58.93 0 bottom
U$74  [#SCL#B3_#0]  8.13,56.39 0 bottom
U$75  [ORDERING_INSTRUCTIONS]  44.96,57.66 0 top
U$76  [FOUR_LAYER_WARNING]  46.23,46.23 0 top
U$77  [#D3_#0]  28.45,30.99 0 top
U$78  [DBG0]  22.73,32.26 90 top
U$79  [#_C7#FREE#0]  28.45,58.93 0 bottom
U$80  [#GND_#0]  51.82,28.45 0 top
U$81  [#3V3_#0]  51.82,23.37 0 top
U$82  [#_VB#0]  31.5,30.99 0 top
U$83  [#_VU#0]  31.5,36.07 0 top
U$84  [#_EN#0]  31.5,33.53 0 top
U$85  [##RST##0]  51.43,20.83 0 top
U$86  [MGM240P0]  41.66,29.72 0 top
U$87  [SFE_LOGO_FLAME_.2]  50.93,62.36 0 top
U$88  [#0]  39.12,27.18 90 top
U$89  [#1]  39.12,22.1 270 top
U$90  [#_GND#0]  51.82,28.45 0 bottom
U$91  [#_3V3#0]  51.82,23.37 0 bottom
U$92  [#_#RST##0]  51.82,20.83 0 bottom
U$93  [#VBAT_#0]  31.5,30.99 0 bottom
U$94  [#VUSB_#0]  31.5,36.07 0 bottom
U$95  [#EN_#0]  31.5,33.53 0 bottom
U$96  [MGM240P0]  42.67,30.99 0 bottom
U$97  [#MEAS#0]  50.55,17.14 90 bottom
U$98  [#CHG#0]  44.83,16.89 90 bottom
U$99  [#I2C#0]  35.31,13.72 90 bottom
U$100  [#PWR#0]  32,14.48 90 bottom
U$101  [PWR0]  35.18,9.65 90 top
U$102  [CHG0]  41.66,21.46 90 top
U$103  [STAT0]  35.81,45.97 90 top
U$104  [THING_PLUS0]  42.29,33.02 0 bottom
U$105  [RST0]  40.77,25.91 90 top
U$106  [#_B4#0]  31.5,58.93 0 top
U$107  [#_B3#0]  31.5,56.39 0 top
U$108  [#_B2#0]  31.5,53.85 0 top
U$109  [#_B1#0]  31.5,51.31 0 top
U$110  [#_B0#0]  31.5,48.77 0 top
U$111  [#_A0#0]  31.5,46.23 0 top
U$112  [#_C5#0]  31.5,38.61 0 top
U$113  [#_C4#0]  31.5,41.15 0 top
U$114  [#C7_#0]  51.82,58.93 0 top
U$115  [#A5_#0]  51.82,56.39 0 top
U$116  [#A6_#0]  51.82,53.85 0 top
U$117  [#C6_#0]  51.82,51.31 0 top
U$118  [#C3_#0]  51.82,48.77 0 top
U$119  [#C2_#0]  51.82,46.23 0 top
U$120  [#C1_#0]  51.82,43.69 0 top
U$121  [#C0_#0]  51.82,41.15 0 top
U$122  [#D0_#0]  51.82,38.61 0 top
U$123  [#D1_#0]  51.82,36.07 0 top
U$124  [#_C1#0]  51.82,43.69 0 bottom
U$125  [#_C0#0]  51.82,41.15 0 bottom
U$126  [#_D0#0]  51.82,38.61 0 bottom
U$127  [#_D1#0]  51.82,36.07 0 bottom
U$128  [#_D2#0]  51.82,33.53 0 bottom
U$129  [#_D3#0]  51.82,30.99 0 bottom
U$130  [#C4_#0]  31.5,41.15 0 bottom
U$131  [#C5_#0]  31.5,38.61 0 bottom
U$132  [#A0_#0]  31.5,46.23 0 bottom
U$133  [#B0_#0]  31.5,48.77 0 bottom
U$134  [#B2_#0]  31.5,53.85 0 bottom
U$135  [#B1_#0]  31.5,51.31 0 bottom
U$136  [#SDA#B4_#0]  31.5,58.93 0 bottom
U$137  [#SCL#B3_#0]  31.5,56.39 0 bottom
U$138  [#_A5#TX#0]  51.82,56.39 0 bottom
U$139  [#_A6#RX#0]  51.82,53.85 0 bottom
U$140  [#_C6#POCI#0]  51.82,51.31 0 bottom
U$141  [#_C3#PICO#0]  51.82,48.77 0 bottom
U$142  [#_C2#SCK#0]  51.82,46.23 0 bottom
U$143  [MINI_SIMPLICITY0]  41.66,49.02 0 top
U$144  [A80]  37.85,45.97 90 top
U$145  [MEAS81]  50.55,19.18 0 top
U$146  [ORDERING_INSTRUCTIONS]  68.33,57.66 0 top
U$147  [FOUR_LAYER_WARNING]  69.6,46.23 0 top
U$148  [#0#5A#0]  44.58,21.46 90 bottom
U$149  [#0#1A#0]  46.35,21.46 90 bottom
U$150  [#D2_#0]  51.82,33.53 0 top
U$151  [#D3_#0]  51.82,30.99 0 top
U$152  [DBG0]  46.1,32.26 90 top
U$153  [#_C7#FREE#0]  51.82,58.93 0 bottom
U$154  [#LP#0]  46.74,36.07 0 bottom
U$155  [#_A4#0]  31.5,43.69 0 top
U$156  [#A4_#0]  31.5,43.69 0 bottom
U$157  [#SHLD#0]  68.96,10.03 0 bottom
U$158  [#GND_#0]  75.18,28.45 0 top
U$159  [#3V3_#0]  75.18,23.37 0 top
U$160  [#_VB#0]  54.86,30.99 0 top
U$161  [#_VU#0]  54.86,36.07 0 top
U$162  [#_EN#0]  54.86,33.53 0 top
U$163  [##RST##0]  74.8,20.83 0 top
U$164  [MGM240P0]  65.02,29.72 0 top
U$165  [SFE_LOGO_FLAME_.2]  74.3,62.36 0 top
U$166  [#0]  62.48,27.18 90 top
U$167  [#1]  62.48,22.1 270 top
U$168  [#_GND#0]  75.18,28.45 0 bottom
U$169  [#_3V3#0]  75.18,23.37 0 bottom
U$170  [#_#RST##0]  75.18,20.83 0 bottom
U$171  [#VBAT_#0]  54.86,30.99 0 bottom
U$172  [#VUSB_#0]  54.86,36.07 0 bottom
U$173  [#EN_#0]  54.86,33.53 0 bottom
U$174  [MGM240P0]  66.04,30.99 0 bottom
U$175  [#MEAS#0]  73.91,17.14 90 bottom
U$176  [#CHG#0]  68.2,16.89 90 bottom
U$177  [#I2C#0]  58.67,13.72 90 bottom
U$178  [#PWR#0]  55.37,14.48 90 bottom
U$179  [PWR0]  58.55,9.65 90 top
U$180  [CHG0]  65.02,21.46 90 top
U$181  [STAT0]  59.18,45.97 90 top
U$182  [THING_PLUS0]  65.66,33.02 0 bottom
U$183  [RST0]  64.14,25.91 90 top
U$184  [#_B4#0]  54.86,58.93 0 top
U$185  [#_B3#0]  54.86,56.39 0 top
U$186  [#_B2#0]  54.86,53.85 0 top
U$187  [#_B1#0]  54.86,51.31 0 top
U$188  [#_B0#0]  54.86,48.77 0 top
U$189  [#_A0#0]  54.86,46.23 0 top
U$190  [#_C5#0]  54.86,38.61 0 top
U$191  [#_C4#0]  54.86,41.15 0 top
U$192  [#C7_#0]  75.18,58.93 0 top
U$193  [#A5_#0]  75.18,56.39 0 top
U$194  [#A6_#0]  75.18,53.85 0 top
U$195  [#C6_#0]  75.18,51.31 0 top
U$196  [#C3_#0]  75.18,48.77 0 top
U$197  [#C2_#0]  75.18,46.23 0 top
U$198  [#C1_#0]  75.18,43.69 0 top
U$199  [#C0_#0]  75.18,41.15 0 top
U$200  [#D0_#0]  75.18,38.61 0 top
U$201  [#D1_#0]  75.18,36.07 0 top
U$202  [#_C1#0]  75.18,43.69 0 bottom
U$203  [#_C0#0]  75.18,41.15 0 bottom
U$204  [#_D0#0]  75.18,38.61 0 bottom
U$205  [#_D1#0]  75.18,36.07 0 bottom
U$206  [#_D2#0]  75.18,33.53 0 bottom
U$207  [#_D3#0]  75.18,30.99 0 bottom
U$208  [#C4_#0]  54.86,41.15 0 bottom
U$209  [#C5_#0]  54.86,38.61 0 bottom
U$210  [#A0_#0]  54.86,46.23 0 bottom
U$211  [#B0_#0]  54.86,48.77 0 bottom
U$212  [#B2_#0]  54.86,53.85 0 bottom
U$213  [#B1_#0]  54.86,51.31 0 bottom
U$214  [#SDA#B4_#0]  54.86,58.93 0 bottom
U$215  [#SCL#B3_#0]  54.86,56.39 0 bottom
U$216  [#_A5#TX#0]  75.18,56.39 0 bottom
U$217  [#_A6#RX#0]  75.18,53.85 0 bottom
U$218  [#_C6#POCI#0]  75.18,51.31 0 bottom
U$219  [#_C3#PICO#0]  75.18,48.77 0 bottom
U$220  [#_C2#SCK#0]  75.18,46.23 0 bottom
U$221  [MINI_SIMPLICITY0]  65.02,49.02 0 top
U$222  [A80]  61.21,45.97 90 top
U$223  [MEAS81]  73.91,19.18 0 top
U$224  [ORDERING_INSTRUCTIONS]  91.69,57.66 0 top  (outside the outline)
U$225  [FOUR_LAYER_WARNING]  92.96,46.23 0 top  (outside the outline)
U$226  [#0#5A#0]  67.95,21.46 90 bottom
U$227  [#0#1A#0]  69.72,21.46 90 bottom
U$228  [#D2_#0]  75.18,33.53 0 top
U$229  [#D3_#0]  75.18,30.99 0 top
U$230  [DBG0]  69.47,32.26 90 top
U$231  [#_C7#FREE#0]  75.18,58.93 0 bottom
U$232  [#LP#0]  70.1,36.07 0 bottom
U$233  [#_A4#0]  54.86,43.69 0 top
U$234  [#A4_#0]  54.86,43.69 0 bottom
Y1  CRYSTAL-48MHZ  [CRYSTAL-SMD-2.0X1.6MM-ECS]  12.57,39.88 90 top
Y2  CRYSTAL-48MHZ  [CRYSTAL-SMD-2.0X1.6MM-ECS]  35.94,39.88 90 top
Y3  CRYSTAL-48MHZ  [CRYSTAL-SMD-2.0X1.6MM-ECS]  59.31,39.88 90 top

## Library data of the parts
C1 C6 C28 C32 C49 C53 = SparkFun-Capacitors; PROD_ID: CAP-14848
C2-C5 C17-C21 C26 C27 C29-C31 C39-C42 C47 C48 C50-C52 C60-C63 = SparkFun-Capacitors; PROD_ID: CAP-14993
C7 C33 C54 = SparkFun-Capacitors; PROD_ID: CAP-13930
C8 C9 C34 C35 C55 C56 = SparkFun-Capacitors; PROD_ID: CAP-14847
C10 C11 C13 C22 C36 C37 C43 C57 C58 = SparkFun-Capacitors; PROD_ID: CAP-12417
C12 C15 C16 C24 C25 C38 C45 C46 C59 = SparkFun-Capacitors; PROD_ID: CAP-14240
C14 C23 C44 = SparkFun-Capacitors; PROD_ID: CAP-14232
CHG CHG1 CHG2 CHG_I CHG_I1 CHG_I2 I2C I2C1 I2C2 LP LP1 LP2 MEAS MEAS1 MEAS2 PWR PWR1 PWR2 SHLD SHLD1 SHLD2 = SparkFun-Jumpers
D1 D7 D15 = SparkFun-DiscreteSemi; PROD_ID: DIO-11623
D2 D9 D16 = SparkFun-LED; PROD_ID: DIO-09003
D3 D10 D17 = SparkFun-IC-Power; PROD_ID: DIO-14084
D4 D6 D11 D13 D18 D20 = SparkFun-LED; PROD_ID: DIO-08575
D5 D12 D19 = SparkFun-LED; PROD_ID: DIO-00819
D8 D14 D21 = SparkFun-DiscreteSemi; PROD_ID: DIO-11018
E$1-E$4 FD1-FD12 LOGO1-LOGO9 U$29 U$75 U$76 U$87 U$146 U$147 U$165 U$224 U$225 = SparkFun-Aesthetics
E$5 E$6 = SparkFun-Retired
FB1-FB3 = SparkFun-Coils; PROD_ID: NDUC-14206
H1-H6 = SparkFun-Hardware
J1 J6 J13 = SparkFun-Boards
J2 J8 J14 = SparkFun-Connectors; PROD_ID: CONN-14122
J3 J10 J16 = SparkFun-Connectors; PROD_ID: CONN-13694
J4 J9 J15 = SparkFun-Connectors; PROD_ID: CONN-11443; SF_ID: PRT-08612
J5 J11 J17 = SparkFun-Connectors; PROD_ID: CONN-13500
J7 J12 J18 TP1-TP42 = SparkFun-Connectors
Q1-Q3 = SparkFun-DiscreteSemi; PROD_ID: TRANS-14388
R1 R13 R18 R29 R30 R36 R47 R48 R54 = SparkFun-Resistors; PROD_ID: RES-14342
R2 R3 R6 R17 R19 R20 R23 R35 R37 R38 R41 R53 = SparkFun-Resistors; PROD_ID: RES-14241
R4 R21 R39 = SparkFun-Resistors; PROD_ID: RES-15343
R5 R22 R40 = SparkFun-Resistors; PROD_ID: RES-15406
R7 R8 R11 R12 R15 R16 R26-R28 R32-R34 R44-R46 R50-R52 = SparkFun-Resistors; PROD_ID: RES-14341
R9 R10 R24 R25 R42 R43 = SparkFun-Resistors; PROD_ID: RES-14340
R14 R31 R49 = SparkFun-Resistors; PROD_ID: RES-13495
S1-S3 = SparkFun-Switches; PROD_ID: SWCH-15606
U1 U8 U15 = MGM240P; PROD_ID: IC-16860
U2 U9 U16 = SparkFun-IC-Power; IOUT: 700mA; PROD_ID: VREG-16775; VOUT: 3.3V
U3 U12 U19 = EFM32GG12B410F1024GL120; PROD_ID: IC-16889
U4 U10 U17 = SparkFun-IC-Power; PROD_ID: IC-09995
U5 U11 U18 = SparkFun-IC-Power; PROD_ID: IC-12551
U6 U13 U20 = M24C02-FMC6TG; PROD_ID: IC-16922
U7 U14 U21 = MX25R8035FZUIL0; PROD_ID: IC-16921
U$1-U$28 U$30-U$74 U$77-U$86 U$88-U$145 U$148-U$164 U$166-U$223 U$226-U$234 = output
Y1-Y3 = CRYSTAL-48MHZ; PROD_ID: XTAL-16925

## Nets
3.3V: C1.1 C2.1 C4.1 C5.1 C6.1 C14.1 C18.1 C19.1 C20.1 C21.1 FB1.2 I2C.2 J1.27 J3.2 J5.4 J7.1 PWR.2 R1.2 R12.2 R14.2 R16.2 R17.2 TP1.1 U1.15 U2.5 U3.C6 U3.C9 U3.G3 U3.H11 U3.J11 U3.K3 U3.L4 U3.L7 U6.8 U7.3 U7.8
3.3V1: C23.1 C27.1 C28.1 C30.1 C31.1 C32.1 C39.1 C40.1 C41.1 C42.1 FB2.2 I2C1.2 J6.27 J10.2 J11.4 J12.1 PWR1.2 R30.2 R31.2 R33.2 R34.2 R35.2 TP15.1 U8.15 U9.5 U12.C6 U12.C9 U12.G3 U12.H11 U12.J11 U12.K3 U12.L4 U12.L7 U13.8 U14.3 U14.8
3.3V2: C44.1 C48.1 C49.1 C51.1 C52.1 C53.1 C60.1 C61.1 C62.1 C63.1 FB3.2 I2C2.2 J13.27 J16.2 J17.4 J18.1 PWR2.2 R48.2 R49.2 R51.2 R52.2 R53.2 TP29.1 U15.15 U16.5 U19.C6 U19.C9 U19.G3 U19.H11 U19.J11 U19.K3 U19.L4 U19.L7 U20.8 U21.3 U21.8
!DBG_RESET!: TP3.1 U3.L8 U3.M7
!DBG_RESET!1: TP17.1 U12.L8 U12.M7
!DBG_RESET!2: TP31.1 U19.L8 U19.M7
!RESET!: J1.28 J7.3 S1.3 S1.4 U1.31 U3.D1
!RESET!1: J6.28 J12.3 S2.3 S2.4 U8.31 U12.D1
!RESET!2: J13.28 J18.3 S3.3 S3.4 U15.31 U19.D1
!SD_CS!/PA01: J11.2 U8.16
!SD_CS!/PA02: J17.2 U15.16
!SD_CS!/PA07: J5.2 U1.16
DBG_CS: R17.1 TP10.1 U3.B1 U3.B2 U7.1
DBG_CS1: R35.1 TP24.1 U12.B1 U12.B2 U14.1
DBG_CS2: R53.1 TP38.1 U19.B1 U19.B2 U21.1
DBG_LED_PWR: C12.1 D6.A U3.A12
DBG_LED_PWR1: C38.1 D13.A U12.A12
DBG_LED_PWR2: C59.1 D20.A U19.A12
DBG_PICO: TP7.1 U3.C3 U7.5
DBG_PICO1: TP21.1 U12.C3 U14.5
DBG_PICO2: TP35.1 U19.C3 U21.5
DBG_POCI: TP8.1 U3.A4 U3.B3 U7.2
DBG_POCI1: TP22.1 U12.A4 U12.B3 U14.2
DBG_POCI2: TP36.1 U19.A4 U19.B3 U21.2
DBG_RX: TP13.1 U3.A1
DBG_RX1: TP27.1 U12.A1
DBG_RX2: TP41.1 U19.A1
DBG_SCK: TP9.1 U3.A3 U7.6
DBG_SCK1: TP23.1 U12.A3 U14.6
DBG_SCK2: TP37.1 U19.A3 U21.6
DBG_SCL: R16.1 TP12.1 U3.H13 U6.6
DBG_SCL1: R34.1 TP26.1 U12.H13 U13.6
DBG_SCL2: R52.1 TP40.1 U19.H13 U20.6
DBG_SDA: R12.1 TP11.1 U3.G13 U3.H12 U3.J12 U6.5
DBG_SDA1: R33.1 TP25.1 U12.G13 U12.H12 U12.J12 U13.5
DBG_SDA2: R51.1 TP39.1 U19.G13 U19.H12 U19.J12 U20.5
DBG_SWCLK: TP4.1 U3.C10
DBG_SWCLK1: TP18.1 U12.C10
DBG_SWCLK2: TP32.1 U19.C10
DBG_SWDIO: TP2.1 U3.A9 U3.B10
DBG_SWDIO1: TP16.1 U12.A9 U12.B10
DBG_SWDIO2: TP30.1 U19.A9 U19.B10
DBG_SWO: TP6.1 U3.A10
DBG_SWO1: TP20.1 U12.A10
DBG_SWO2: TP34.1 U19.A10
DBG_TX: TP14.1 U3.A2
DBG_TX1: TP28.1 U12.A2
DBG_TX2: TP42.1 U19.A2
DBG_WAKE: D8.A U3.E1
DBG_WAKE1: D14.A U12.E1
DBG_WAKE2: D21.A U19.E1
DBG_WP: R14.1 U3.F13 U6.7
DBG_WP1: R31.1 U12.F13 U13.7
DBG_WP2: R49.1 U19.F13 U20.7
EN: J1.11 R2.2 U2.3
EN1: J6.11 R19.2 U9.3
EN2: J13.11 R37.2 U16.3
GND: C1.2 C2.2 C3.2 C4.2 C5.2 C6.2 C7.2 C8.2 C9.2 C10.2 C11.2 C12.2 C13.2 C14.2 C15.2 C16.2 C17.2 C18.2 C19.2 C20.2 C21.2 D3.2 D5.C J1.25 J2.GND J2.GND2 J3.1 J4.1 J5.6 J5.GND1 J5.GND2 J5.GND3 J5.GND4 J5.GND5 J5.GND6 J7.2 R3.1 R5.1 R6.1 R9.1 R10.1 R11.1 R18.1 S1.1 S1.2 SHLD.1 TP5.1 U1.1 U1.14 U1.23 U1.32 U1.34 U1.35 U1.36 U2.2 U3.C5 U3.C8 U3.H3 U3.J3 U3.K11 U3.K12 U3.L5 U3.L6 U3.M8 U3.M11 U3.N8 U3.N12 U4.2 U5.1 U5.4 U5.6 U5.9 U6.1 U6.2 U6.3 U6.4 U6.EPAD U7.4 U7.EPAD Y1.2 Y1.4
GND1: C22.2 C23.2 C24.2 C25.2 C26.2 C27.2 C28.2 C29.2 C30.2 C31.2 C32.2 C33.2 C34.2 C35.2 C36.2 C37.2 C38.2 C39.2 C40.2 C41.2 C42.2 D10.2 D12.C J6.25 J8.GND J8.GND2 J9.1 J10.1 J11.6 J11.GND1 J11.GND2 J11.GND3 J11.GND4 J11.GND5 J11.GND6 J12.2 R20.1 R22.1 R23.1 R24.1 R25.1 R28.1 R36.1 S2.1 S2.2 SHLD1.1 TP19.1 U8.1 U8.14 U8.23 U8.32 U8.34 U8.35 U8.36 U9.2 U10.2 U11.1 U11.4 U11.6 U11.9 U12.C5 U12.C8 U12.H3 U12.J3 U12.K11 U12.K12 U12.L5 U12.L6 U12.M8 U12.M11 U12.N8 U12.N12 U13.1 U13.2 U13.3 U13.4 U13.EPAD U14.4 U14.EPAD Y2.2 Y2.4
GND2: C43.2 C44.2 C45.2 C46.2 C47.2 C48.2 C49.2 C50.2 C51.2 C52.2 C53.2 C54.2 C55.2 C56.2 C57.2 C58.2 C59.2 C60.2 C61.2 C62.2 C63.2 D17.2 D19.C J13.25 J14.GND J14.GND2 J15.1 J16.1 J17.6 J17.GND1 J17.GND2 J17.GND3 J17.GND4 J17.GND5 J17.GND6 J18.2 R38.1 R40.1 R41.1 R42.1 R43.1 R46.1 R54.1 S3.1 S3.2 SHLD2.1 TP33.1 U15.1 U15.14 U15.23 U15.32 U15.34 U15.35 U15.36 U16.2 U17.2 U18.1 U18.4 U18.6 U18.9 U19.C5 U19.C8 U19.H3 U19.J3 U19.K11 U19.K12 U19.L5 U19.L6 U19.M8 U19.M11 U19.N8 U19.N12 U20.1 U20.2 U20.3 U20.4 U20.EPAD U21.4 U21.EPAD Y3.2 Y3.4
LED/PA01: D11.A U8.17
LED/PA02: D18.A U15.17
LED/PA08: D4.A U1.17
N$1: D4.C R11.2
N$2: PWR.1 R13.2
N$3: CHG.2 D2.A
N$4: CHG_I.1 R6.2
N$5: D2.C U4.1
N$6: CHG_I.3 R5.2
N$7: D1.C MEAS.1 MEAS.3 Q1.2
N$8: D5.A R13.1
N$9: CHG_I.2 U4.5
N$10: CHG.1 R4.1
N$11: I2C.3 R7.2
N$12: C3.1 R1.1 U3.L10
N$13: I2C.1 R8.2
N$14: J2.B5 R9.2
N$15: J2.A5 R10.2
N$16: D3.3 J2.A6 J2.B6
N$17: C7.1 U3.J13
N$18: D3.1 J2.A7 J2.B7
N$19: C8.1 C9.1 C10.1 FB1.1 U3.M9 U3.M10 U3.N11
N$20: R15.1 U3.L9
N$21: D6.C R15.2
N$22: U3.N10 Y1.1
N$23: U3.N9 Y1.3
N$24: D8.C LP.1 R18.2
N$25: CHG1.2 D9.A
N$26: D9.C U10.1
N$27: C13.1 MEAS.2 MEAS.4 R2.1 U2.1
N$28: CHG_I1.1 R23.2
N$29: CHG_I1.3 R22.2
N$30: CHG_I1.2 U10.5
N$31: CHG1.1 R21.1
N$32: J8.B5 R24.2
N$33: J8.A5 R25.2
N$34: D10.1 J8.A7 J8.B7
N$35: C22.1 MEAS1.2 MEAS1.4 R19.1 U9.1
N$36: I2C1.3 R26.2
N$37: I2C1.1 R27.2
N$38: D11.C R28.2
N$39: D7.C MEAS1.1 MEAS1.3 Q2.2
N$40: PWR1.1 R29.2
N$41: D12.A R29.1
N$42: C29.1 R30.1 U12.L10
N$43: D10.3 J8.A6 J8.B6
N$44: C33.1 U12.J13
N$45: C34.1 C35.1 C36.1 FB2.1 U12.M9 U12.M10 U12.N11
N$46: R32.1 U12.L9
N$47: D13.C R32.2
N$48: U12.N10 Y2.1
N$49: U12.N9 Y2.3
N$50: D14.C LP1.1 R36.2
N$51: CHG2.2 D16.A
N$52: D16.C U17.1
N$53: CHG_I2.1 R41.2
N$54: CHG_I2.3 R40.2
N$55: CHG_I2.2 U17.5
N$56: CHG2.1 R39.1
N$57: J14.B5 R42.2
N$58: J14.A5 R43.2
N$59: D17.1 J14.A7 J14.B7
N$60: C43.1 MEAS2.2 MEAS2.4 R37.1 U16.1
N$61: I2C2.3 R44.2
N$62: I2C2.1 R45.2
N$63: D18.C R46.2
N$64: D15.C MEAS2.1 MEAS2.3 Q3.2
N$65: PWR2.1 R47.2
N$66: D19.A R47.1
N$67: C50.1 R48.1 U19.L10
N$68: D17.3 J14.A6 J14.B6
N$69: C54.1 U19.J13
N$70: C55.1 C56.1 C57.1 FB3.1 U19.M9 U19.M10 U19.N11
N$71: R50.1 U19.L9
N$72: D20.C R50.2
N$73: U19.N10 Y3.1
N$74: U19.N9 Y3.3
N$75: D21.C LP2.1 R54.2
PA00: J1.6 U1.7
PA01: J6.6 U8.7
PA02: J6.7 U8.11
PA03: J13.6 U15.7
PA04: J1.7 U1.11
PA05: J13.7 U15.11
PB00: J1.5 U1.6
PB01: J1.4 U1.5
PB02: J1.3 U1.4
PB03: J6.5 U8.6
PB04: J6.4 U8.5
PB05: J6.3 U8.4
PB06: J13.5 U15.6
PB07: J13.4 U15.5
PB08: J13.3 U15.4
PC00: J1.20 U1.22
PC01: J1.19 U1.24
PC02: J6.19 U8.24
PC03: J6.20 U8.22
PC04: J6.13 U8.30
PC05: J13.19 U15.24
PC06: J13.20 U15.22
PC07: J1.13 U1.30
PC08: J13.13 U15.30
PD00: J1.21 U1.21
PD01: J1.22 U1.20
PD02: J1.23 U1.19
PD03: J1.24 U1.18
PD04: J6.21 U8.21
PD05: J6.22 U8.20
PD06: J6.23 U8.19
PD07: J6.24 U8.18
PD08: J13.21 U15.21
PD09: J13.22 U15.20
PD10: J13.23 U15.19
PD11: J13.24 U15.18
PICO/PC01: J6.17 J11.3 U8.26
PICO/PC02: J13.17 J17.3 U15.26
PICO/PC03: J1.17 J5.3 U1.26
POCI/PC01: J6.16 J11.7 U8.29
POCI/PC02: J13.16 J17.7 U15.29
POCI/PC06: J1.16 J5.7 U1.29
PTI_DATA/PC01: J6.8 J12.10 U8.27 U12.N1
PTI_DATA/PC02: J13.8 J18.10 U15.27 U19.N1
PTI_DATA/PC04: J1.8 J7.10 U1.27 U3.N1
PTI_FRAME/PC01: J6.9 J12.9 U8.28 U12.N2
PTI_FRAME/PC02: J13.9 J18.9 U15.28 U19.N2
PTI_FRAME/PC05: J1.9 J7.9 U1.28 U3.N2
RX/PA01: J6.15 J12.4 U8.13 U12.L1
RX/PA02: J13.15 J18.4 U15.13 U19.L1
RX/PA06: J1.15 J7.4 U1.13 U3.L1
SCK/PC01: J6.18 J11.5 U8.25
SCK/PC02: J1.18 J5.5 U1.25
SCK/PC03: J13.18 J17.5 U15.25
SCL/PB01: J6.2 J10.4 R26.1 U8.3 U11.7
SCL/PB02: J13.2 J16.4 R44.1 U15.3 U18.7
SCL/PB03: J1.2 J3.4 R7.1 U1.3 U5.7
SDA/PB01: J6.1 J10.3 R27.1 U8.2 U11.8
SDA/PB02: J13.1 J16.3 R45.1 U15.2 U18.8
SDA/PB04: J1.1 J3.3 R8.1 U1.2 U5.8
SHLD: J2.SHLD1 J2.SHLD2 J2.SHLD3 J2.SHLD4 J2.SHLD5 J2.SHLD6 J2.SHLD7 J2.SHLD8 SHLD.2
SHLD1: J8.SHLD1 J8.SHLD2 J8.SHLD3 J8.SHLD4 J8.SHLD5 J8.SHLD6 J8.SHLD7 J8.SHLD8 SHLD1.2
SHLD2: J14.SHLD1 J14.SHLD2 J14.SHLD3 J14.SHLD4 J14.SHLD5 J14.SHLD6 J14.SHLD7 J14.SHLD8 SHLD2.2
SWCLK/PA01: J7.8 U1.8 U3.C1
SWCLK/PA02: J12.8 U8.8 U12.C1
SWCLK/PA03: J18.8 U15.8 U19.C1
SWDIO/PA01: J12.7 U8.9 U12.C2 U12.D3
SWDIO/PA02: J7.7 U1.9 U3.C2 U3.D3
SWDIO/PA03: J18.7 U15.9 U19.C2 U19.D3
SWO/PA01: J12.6 U8.10 U12.E3
SWO/PA02: J18.6 U15.10 U19.E3
SWO/PA03: J7.6 U1.10 U3.E3
TX/PA01: J6.14 J12.5 U8.12 U12.K1 U12.L2
TX/PA02: J13.14 J18.5 U15.12 U19.K1 U19.L2
TX/PA05: J1.14 J7.5 U1.12 U3.K1 U3.L2
USB_N [USB]: D3.6 U3.B13
USB_N1 [USB]: D10.6 U12.B13
USB_N2 [USB]: D17.6 U19.B13
USB_P [USB]: D3.4 U3.A13
USB_P1 [USB]: D10.4 U12.A13
USB_P2 [USB]: D17.4 U19.A13
V_BATT: C16.1 C17.1 J1.12 J4.2 Q1.3 U4.3 U5.2 U5.3
V_BATT1: C25.1 C26.1 J6.12 J9.2 Q2.3 U10.3 U11.2 U11.3
V_BATT2: C46.1 C47.1 J13.12 J15.2 Q3.3 U17.3 U18.2 U18.3
V_USB: C11.1 C15.1 D1.A D3.5 J1.10 J2.VBUS1 J2.VBUS2 LP.2 Q1.1 R3.2 R4.2 U3.A11 U3.B12 U4.4
V_USB1: C24.1 C37.1 D7.A D10.5 J6.10 J8.VBUS1 J8.VBUS2 LP1.2 Q2.1 R20.2 R21.2 U10.4 U12.A11 U12.B12
V_USB2: C45.1 C58.1 D15.A D17.5 J13.10 J14.VBUS1 J14.VBUS2 LP2.2 Q3.1 R38.2 R39.2 U17.4 U19.A11 U19.B12